# Altium PCB 175-00036, rev1, Super Sniffer.PcbDoc (part 2 of 4)
Units mil, origin at the board's own origin, x right, y up, seen from the top; angles counter-clockwise.
Board outline 6299.21 x 7874.02 mil, 5 copper layers (Top Layer (*.GTL), Mid-Layer 1 (*.G1), Internal Plane 1 (*.GP1), Mid-Layer 2  (*.G2), Bottom Layer (*.GBL)); 205 components, 359 nets, 1160 pads, 445 vias.
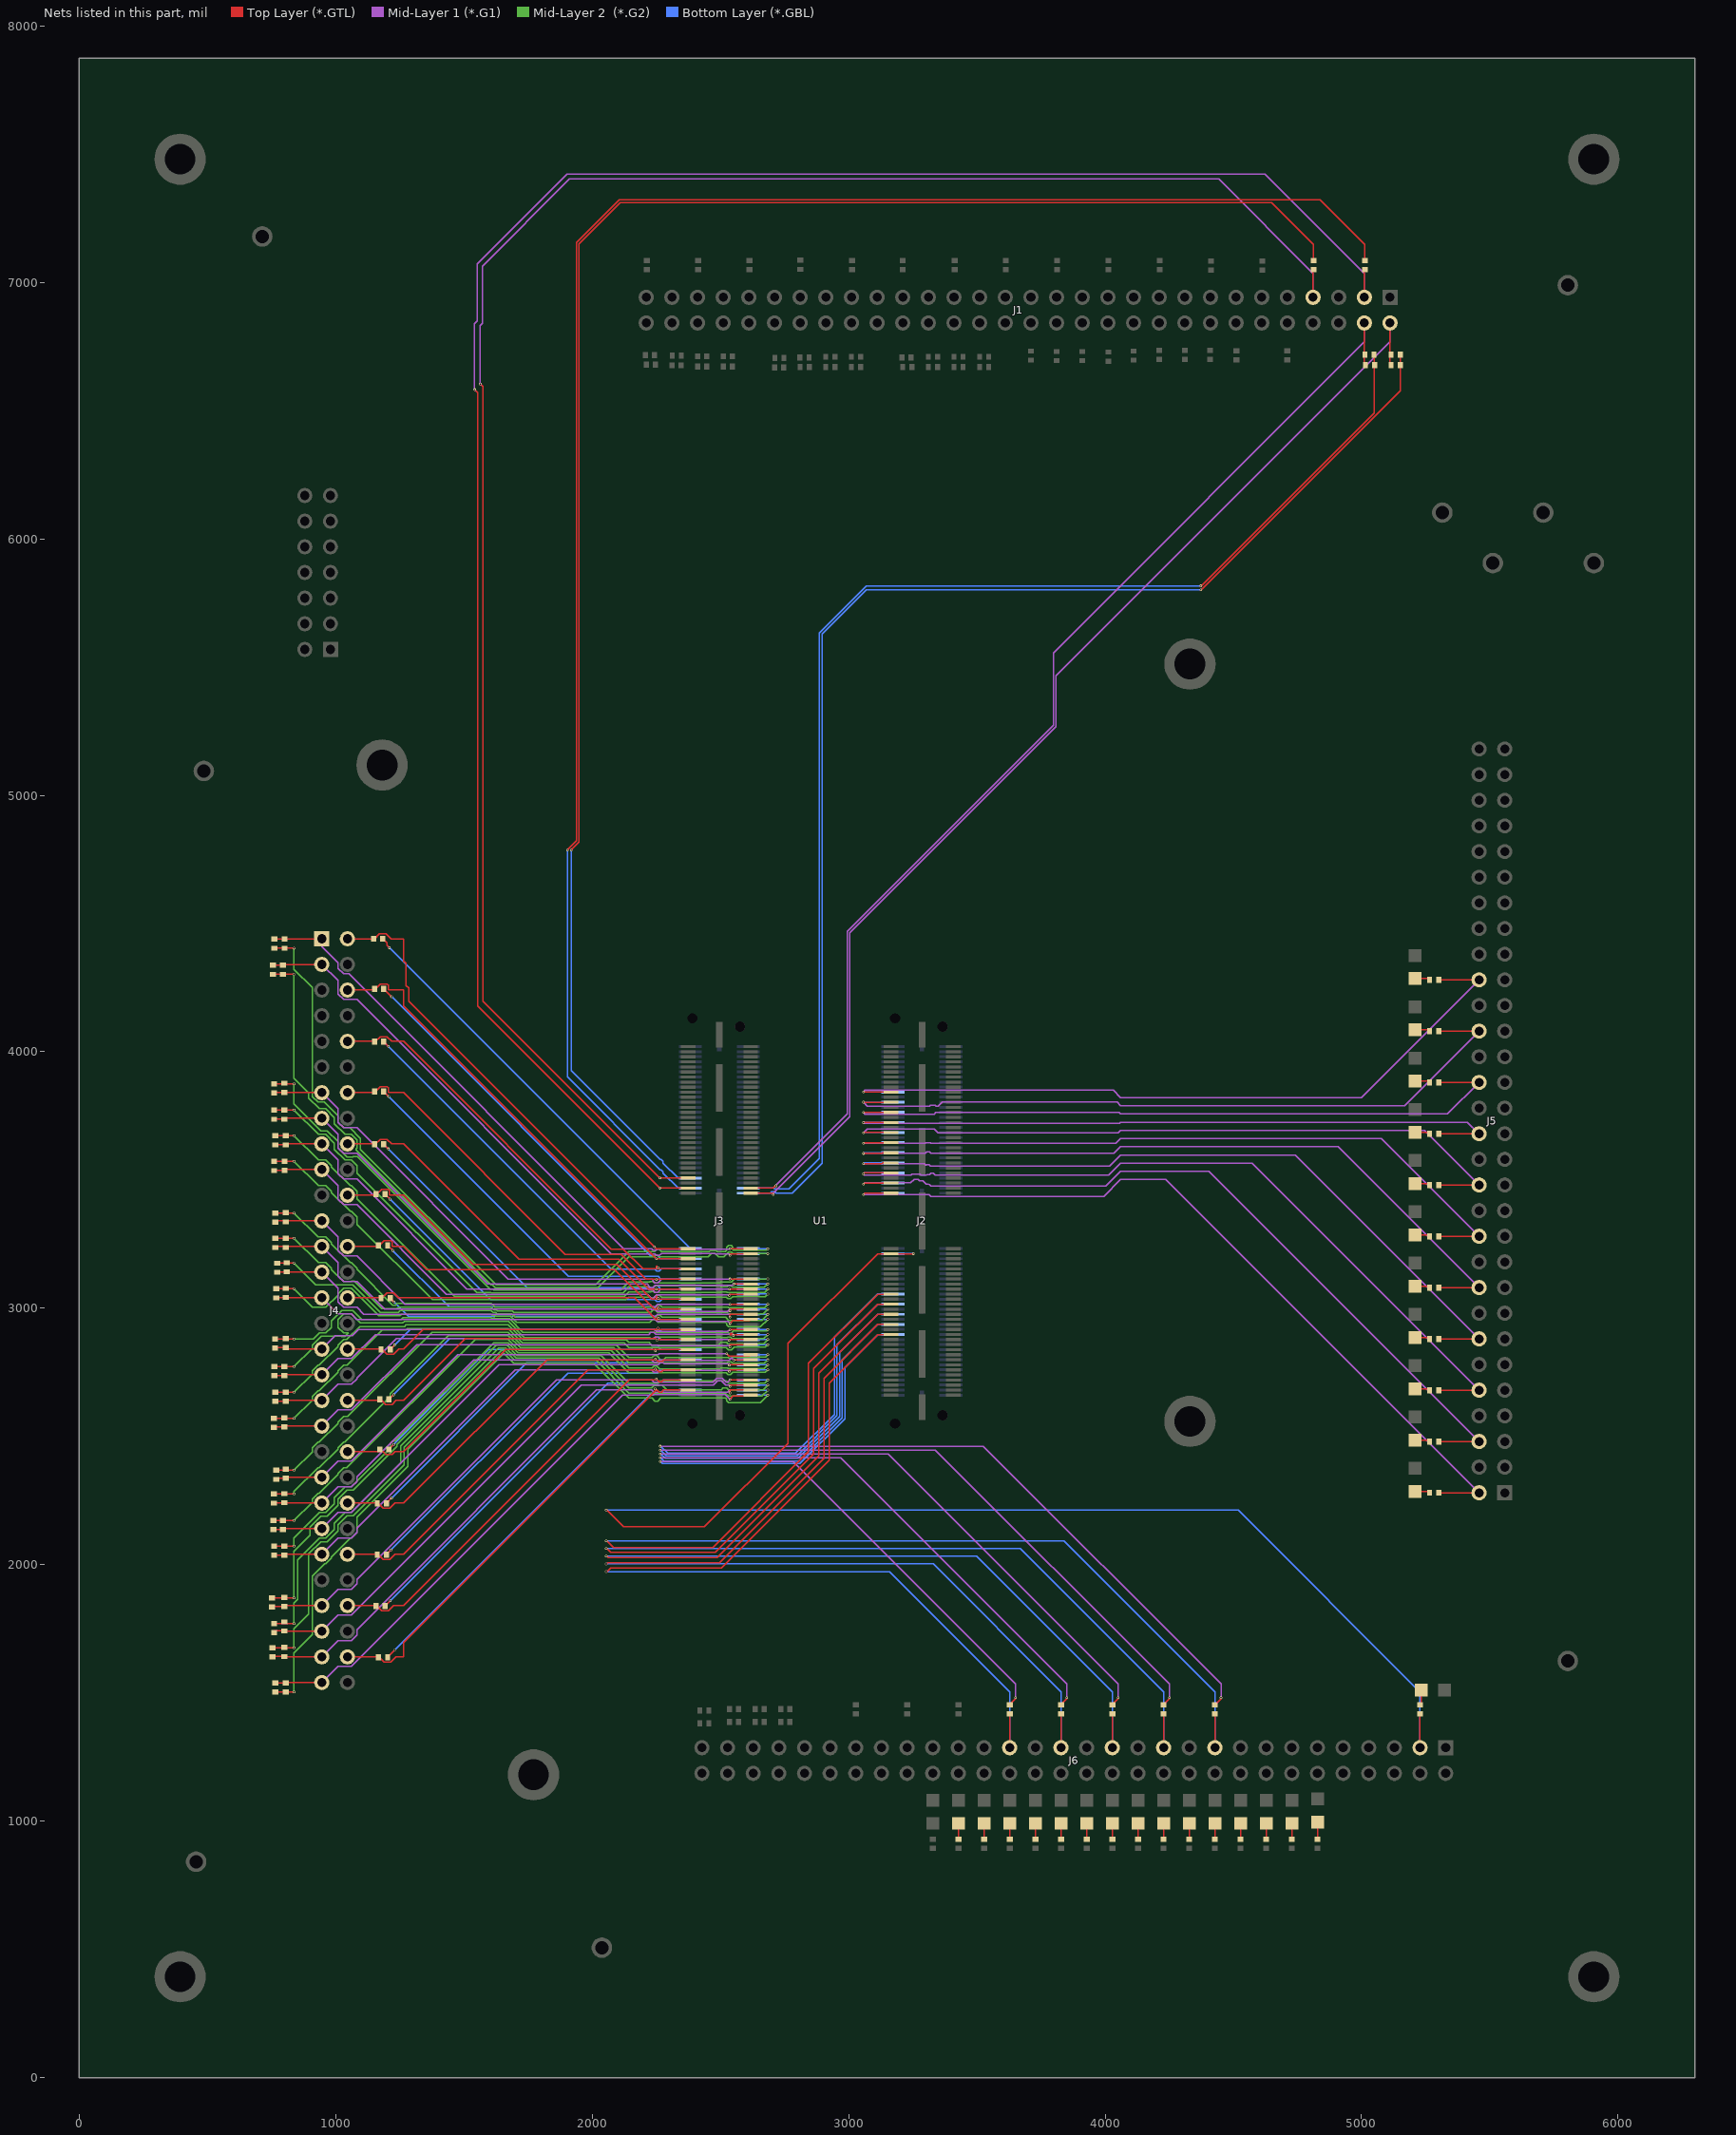
[diagram p5: the nets of this part, all layers, seen from the top]

## Via types
v1: diameter 10, hole 6, Top Layer (*.GTL) to Bottom Layer (*.GBL), 437 vias
v2: diameter 20, hole 10, Top Layer (*.GTL) to Bottom Layer (*.GBL), 8 vias

## Nets (pads, with @x,y where several pads share a name; then routed paths per layer and width w, separated by ;. In a path a pad name is that pad's centre, name@x,y a point inside that pad or via, vN(x,y) a via of type N, cw(c..) or ccw(c..) an arc to the next point about the centre after c; other vN are vias at no path point) (continued)
NetD40_1: D40.1 J1.7 U1.B54 | length 7692.1
  Top Layer (*.GTL) w5: v1(1564.28,6603.04) 1574.05,6593.27 1574.05,4198 v1(2264.05,3508) U1.B54@2374.74,3508 ; J1.7@4811.05,6941.81 D40.1@4811.05,7048.09
  Mid-Layer 1 (*.G1) w5: v1(1564.28,6603.04) 1562.38,6604.93 1562.38,6830.96 1572.05,6840.62 1572.05,7063.51 1911.35,7402.81 4443.05,7402.81 4811.05,7034.81 J1.7@4811.05,6941.81
NetD40_2: D40.2 J3.54 | length 6938.4
  Top Layer (*.GTL) w5: v1(1919.05,4785.81) 1919.05,4788.49 1949.05,4818.49 1949.05,7150.66 2110.2,7311.81 4649.05,7311.81 4813.05,7147.81 D40.2@4813.05,7085.53
  Bottom Layer (*.GBL) w5: v1(1919.05,4785.81) 1919.05,3926.22 2265.71,3579.56 2269.22,3579.56 2276.55,3572.23 2276.55,3566.51 2335.05,3508.01 J3.54@2383.06,3508.01
NetD41_1: D41.1 D43.2 J3.57 | length 5122.3
  Top Layer (*.GTL) w5: v1(4373.05,5816.81) 4375.72,5816.81 5048.48,6489.57 D41.1@5048.48,6717.81
  Bottom Layer (*.GBL) w5: J3.57@2609.04,3468.61 2708.28,3468.61 2711.58,3465.31 2767.85,3465.31 2886.05,3583.51 2886.05,5632.95 3069.91,5816.81 v1(4373.05,5816.81)
NetD41_2: D41.2 D43.1 J1.4 U1.B57 | length 4583
  Top Layer (*.GTL) w5: U1.B57@2618.05,3468.63 2706.05,3468.63 2715.23,3477.81 v1(2716.76,3477.81) ; D43.1@5011.05,6677.81 J1.4@5011.05,6841.81
  Mid-Layer 1 (*.G1) w5: v1(2716.76,3477.81) 2715.23,3477.81 2995.05,3757.63 2995.05,4468.83 3799,5272.78 3799,5555.76 5011.05,6767.81 J1.4@5011.05,6841.81
NetD42_1: D42.1 D46.2 J3.59 | length 5192.2
  Top Layer (*.GTL) w5: v1(4373.05,5801.81) 4375.72,5801.81 5150.76,6576.85 D46.2@5150.76,6677.81 D42.1@5150.76,6717.81
  Bottom Layer (*.GBL) w5: J3.59@2609.04,3448.91 2694.47,3448.91 2700.87,3455.31 2711.22,3455.31 2717.62,3448.91 2779.31,3448.91 2896.05,3565.65 2896.05,5628.81 3069.05,5801.81 v1(4373.05,5801.81)
NetD42_2: D42.2 D46.1 J1.2 U1.B59 | length 4656.3
  Top Layer (*.GTL) w5: U1.B59@2618.05,3448.94 2706.05,3448.94 v1(2706.05,3442.81) ; D46.1@5111.05,6674.81 J1.2@5111.05,6841.81
  Mid-Layer 1 (*.G1) w5: v1(2706.05,3442.81) 2706.05,3448.94 3005.05,3747.94 3005.05,4464.69 3809,5268.64 3809,5465.76 5111.05,6767.81 J1.2@5111.05,6841.81
NetD44_1: D44.1 J1.3 U1.B58 | length 7982.2
  Top Layer (*.GTL) w5: v1(1543.06,6581.83) 1554.05,6570.84 1554.05,4178.63 v1(2264.05,3468.63) U1.B58@2374.74,3468.63 ; J1.3@5011.05,6941.81 D44.1@5011.05,7048.09
  Mid-Layer 1 (*.G1) w5: v1(1543.06,6581.83) 1541.17,6583.72 1541.17,6838.03 1552.05,6848.9 1552.05,7071.79 1903.07,7422.81 4623.05,7422.81 5011.05,7034.81 J1.3@5011.05,6941.81
NetD44_2: D44.2 J3.58 | length 7206.8
  Top Layer (*.GTL) w5: v1(1904.05,4785.81) 1904.05,4788.49 1939.05,4823.49 1939.05,7154.8 2106.06,7321.81 4839.05,7321.81 5013.05,7147.81 D44.2@5013.05,7085.53
  Bottom Layer (*.GBL) w5: v1(1904.05,4785.81) 1904.05,3901.85 2265.71,3540.19 2269.22,3540.19 2276.55,3532.86 2276.55,3527.11 2335.05,3468.61 J3.58@2383.06,3468.61
NetD45_1: D45.1 D48.2 J3.61 | length 2978.7
  Top Layer (*.GTL) w5: D48.2@761.05,4404.09 D45.1@801.05,4404.09 v1(838.05,4404.09)
  Mid-Layer 2  (*.G2) w5: v1(838.05,4404.09) 838.05,4321.89 909.02,4250.92 909.02,3825.47 930.71,3803.78 955.24,3803.78 1009.02,3750 1009.02,3725.47 1030.71,3703.78 1055.24,3703.78 1097.07,3661.95 1097.07,3619.67 1625.95,3090.79 2012.73,3090.79 2143.05,3221.11 2242.28,3221.11 2251.71,3230.54 2262.07,3230.54 2271.5,3221.11 2457.46,3221.11 2460.66,3224.31 2483.44,3224.31 2486.64,3221.11 2519.53,3221.11 2524.55,3226.13 2524.55,3237.59 2531.87,3244.91 2542.22,3244.91 2549.55,3237.59 2549.55,3227.23 2549,3226.68 2679.01,3226.68 v1(2685.05,3232.71)
  Bottom Layer (*.GBL) w5: J3.61@2609.04,3232.71 v1(2685.05,3232.71)
NetD45_2: D45.2 D48.1 J4.1 U1.B61 | length 2393
  Top Layer (*.GTL) w5: D48.1@761.05,4439.53 D45.2@801.05,4439.53 802.33,4440.81 J4.1@946.05,4440.81 ; v1(2537.05,3232.41) U1.B61@2618.05,3232.41
  Mid-Layer 1 (*.G1) w5: J4.1@946.05,4440.81 946.05,4409.41 1009.02,4346.44 1009.02,4325.47 1030.71,4303.78 1051.67,4303.78 2123.05,3232.41 2232.77,3232.41 2237.87,3227.31 2248.48,3227.31 2251.71,3230.54 2535.18,3230.54 v1(2537.05,3232.41)
NetD47_1: D47.1 D50.2 J3.63 | length 2877.6
  Top Layer (*.GTL) w5: D50.2@755.05,4302.09 D47.1@795.05,4302.09 v1(838.05,4302.09)
  Mid-Layer 2  (*.G2) w5: v1(838.05,4302.09) 838.05,3896.45 895.02,3839.47 895.02,3819.67 936.86,3777.84 961.38,3777.84 995.02,3744.2 995.02,3719.67 1036.86,3677.84 1061.38,3677.84 1083.07,3656.15 1083.07,3625.47 1079.16,3621.56 1079.16,3617.78 1606.15,3090.79 1611.8,3090.79 1621.8,3080.79 2022.43,3080.79 2143.05,3201.41 2240.74,3201.41 2244.87,3205.54 2255.22,3205.54 2259.35,3201.41 2451.9,3201.41 2464.8,3214.31 2479.3,3214.31 2492.2,3201.41 2513.97,3201.41 2531.87,3219.31 2542.22,3219.31 2548.52,3213.01 v1(2685.05,3213.01)
  Bottom Layer (*.GBL) w5: J3.63@2609.04,3213.01 v1(2685.05,3213.01)
NetD47_2: D47.2 D50.1 J4.3 U1.B63 | length 2372.8
  Top Layer (*.GTL) w5: D50.1@755.05,4337.53 D47.2@795.05,4337.53 ; D47.2@802.33,4340.81 J4.3@946.05,4340.81 ; v1(2537.05,3206.81) 2537.05,3212.72 U1.B63@2618.05,3212.72
  Mid-Layer 1 (*.G1) w5: J4.3@946.05,4340.81 1009.02,4277.84 1009.02,4225.47 1030.71,4203.78 1083.07,4203.78 2074.13,3212.72 2244.53,3212.72 2251.71,3205.54 2262.07,3205.54 2270.84,3214.31 2479.3,3214.31 2480.88,3212.72 2537.05,3212.72 v1(2537.05,3206.81)
NetD49_1: D49.1 J4.2 U1.B62 | length 1988.8
  Top Layer (*.GTL) w5: J4.2@1046.05,4440.81 D49.1@1148.61,4440.81 1151.79,4440.81 1171.1,4460.12 1197,4460.12 1216.31,4440.81 1265.05,4440.81 1265.05,4350.81 1269.19,4350.81 1275.05,4344.95 1275.05,4259.1 1285.05,4249.1 1285.05,4197.41 2250.05,3232.41 ; v1(2243.05,3239.81) 2243.05,3239.41 2250.05,3232.41 ; U1.B62@2374.74,3232.41 2250.05,3232.41
NetD49_2: D49.2 J3.62 | length 1704.7
  Top Layer (*.GTL) w5: D49.2@1184.05,4440.81 1200.05,4424.81 1200.05,4415.72 v1(1209.77,4406)
  Bottom Layer (*.GBL) w5: v1(1209.77,4406) J3.62@2383.06,3232.71
NetD51_1: D51.1 J4.6 U1.B66 | length 1830.2
  Top Layer (*.GTL) w5: J4.6@1046.05,4240.81 D51.1@1151.5,4240.81 ; D51.1@1152.33,4240.81 D51.1@1151.5,4240.81 ; U1.B66@2374.74,3193.04 v1(2250.05,3193.04) 1265.05,4178.04 1265.05,4240.81 1205.91,4240.81 1205.11,4241.61 1205.11,4259.73 1200.71,4264.12 1174.81,4264.12 D51.1@1151.5,4240.81
NetD51_2: D51.2 J3.66 | length 1630.8
  Top Layer (*.GTL) w5: D51.2@1187.76,4244.81 v1@1217.81,4214.76
  Bottom Layer (*.GBL) w5: v1(1218.05,4215) 2227.27,3205.78 ; 2227.04,3205.54 2255.22,3205.54 2267.45,3193.31 J3.66@2383.06,3193.31
NetD52_1: D52.1 J4.10 U1.B70 | length 1732.4
  Top Layer (*.GTL) w5: J4.10@1046.05,4040.81 1156.5,4040.81 1174.81,4059.12 1200.71,4059.12 1219.02,4040.81 1265.05,4040.81 2075.05,3230.81 2121.49,3230.81 2198.63,3153.67 2250.05,3153.67 ; v1(2257.05,3157.81) 2250.05,3164.81 2250.05,3153.67 ; U1.B70@2374.74,3153.67 2250.05,3153.67
NetD52_2: D52.2 J3.70 | length 1569.6
  Top Layer (*.GTL) w5: D52.2@1187.76,4039.81 1206.05,4021.53 v1(1206.05,4020.81)
  Bottom Layer (*.GBL) w5: v1@1206.41,4021.17 2075.26,3152.31 2244.87,3152.31 2251.87,3145.31 2262.22,3145.31 2270.83,3153.91 J3.70@2383.06,3153.91
NetD53_1: D53.1 D55.2 J3.73 | length 2420.5
  Top Layer (*.GTL) w5: D53.1@760.05,3875.24 v1(838.05,3875.24)
  Mid-Layer 2  (*.G2) w5: v1(838.05,3875.24) 838.05,3796.45 942.65,3691.84 967.18,3691.84 1009.02,3650 1009.02,3625.47 1044.71,3589.78 1067.18,3589.78 1069.24,3591.84 1085.3,3591.84 1602.05,3075.09 1613.36,3075.09 1617.66,3070.79 2110.93,3070.79 2143.05,3102.91 2224.47,3102.91 2226.87,3105.31 2237.22,3105.31 2243.22,3099.31 2498.45,3099.31 2502.05,3102.91 2530.76,3102.91 2531.87,3101.8 2542.22,3101.8 2553.74,3113.31 2683.84,3113.31 v1(2685.05,3114.51)
  Bottom Layer (*.GBL) w5: J3.73@2609.04,3114.51 v1(2685.05,3114.51)
NetD53_2: D53.2 D55.1 J4.13 U1.B73 | length 2201.2
  Top Layer (*.GTL) w5: D53.2@760.05,3842.09 D55.1@800.05,3842.09 ; D55.1@802.33,3840.81 J4.13@946.05,3840.81 ; v1(2537.05,3114.3) U1.B73@2618.05,3114.3
  Mid-Layer 1 (*.G1) w5: J4.13@946.05,3840.81 1009.02,3777.84 1009.02,3725.47 1030.71,3703.78 1083.07,3703.78 1672.56,3114.3 2232.37,3114.3 2237.55,3109.12 2237.55,3106.63 2244.87,3099.31 2255.22,3099.31 2270.21,3114.3 v1(2537.05,3114.3)
NetD54_1: D54.1 D58.2 J3.75 | length 2351.9
  Top Layer (*.GTL) w5: D54.1@760.05,3772.53 D58.2@800.05,3772.53 v1(838.05,3772.53)
  Mid-Layer 2  (*.G2) w5: v1(838.05,3772.53) 932.74,3677.84 961.38,3677.84 995.02,3644.2 995.02,3619.67 1036.86,3577.84 1061.38,3577.84 1083.07,3556.15 1083.07,3527.5 1549.48,3061.09 1606.15,3061.09 1606.45,3060.79 2120.63,3060.79 2143.05,3083.21 2223.97,3083.21 2226.87,3080.31 2237.22,3080.31 2244.34,3087.43 2497.83,3087.43 2502.05,3083.21 2525.77,3083.21 2529.87,3087.31 2541.87,3087.31 2547.87,3081.31 2671.54,3081.31 v1(2685.05,3094.81)
  Bottom Layer (*.GBL) w5: J3.75@2609.04,3094.81 v1(2685.05,3094.81)
NetD54_2: D54.2 D58.1 J4.15 U1.B75 | length 2168.2
  Top Layer (*.GTL) w5: D54.2@760.05,3737.09 D58.1@800.05,3737.09 ; D58.1@802.33,3740.81 J4.15@946.05,3740.81 ; v1(2553.05,3094.61) U1.B75@2618.05,3094.61
  Mid-Layer 1 (*.G1) w5: J4.15@946.05,3740.81 1009.02,3677.84 1009.02,3625.47 1030.71,3603.78 1083.07,3603.78 1592.24,3094.61 2216.57,3094.61 2219.55,3091.63 2219.55,3087.63 2226.87,3080.31 2237.22,3080.31 2246.22,3089.31 2547.74,3089.31 v1(2553.05,3094.61)
NetD56_1: D56.1 J4.14 U1.B74 | length 1662.9
  Top Layer (*.GTL) w5: J4.14@1046.05,3840.81 D56.1@1151.5,3840.81 ; D56.1@1152.33,3840.81 D56.1@1151.5,3840.81 ; v1(2250.05,3111.81) v1@2250.05,3114.3 ; U1.B74@2374.74,3114.3 v1@2250.05,3114.3 ; D56.1@1151.5,3840.81 1174.81,3864.12 1200.71,3864.12 1205.11,3859.73 1205.11,3841.61 1205.91,3840.81 1265.05,3840.81 1895.05,3210.81 2113.21,3210.81 2209.72,3114.3 v1@2250.05,3114.3
NetD56_2: D56.2 J3.74 | length 1497.9
  Top Layer (*.GTL) w5: D56.2@1187.76,3844.81 1206.76,3825.81 v1(1207.05,3825.81)
  Bottom Layer (*.GBL) w5: v1@1206.91,3825.67 1908.26,3124.31 2257.71,3124.31 2267.51,3114.51 J3.74@2383.06,3114.51
NetD57_1: D57.1 D60.2 J3.77 | length 2289.6
  Top Layer (*.GTL) w5: D57.1@765.05,3672.53 D60.2@805.05,3672.53 v1(838.05,3672.53)
  Mid-Layer 2  (*.G2) w5: v1(838.05,3672.53) 932.74,3577.84 961.38,3577.84 983.07,3556.15 983.07,3551.42 1056.65,3477.84 1061.38,3477.84 1083.07,3456.15 1083.07,3427.5 1463.48,3047.09 2126.63,3047.09 2143.05,3063.51 2228.07,3063.51 2229.87,3065.31 2240.22,3065.31 2243.11,3062.43 2500.97,3062.43 2502.05,3063.51 2524.67,3063.51 2525.87,3062.31 2672.24,3062.31 v1(2685.05,3075.11)
  Bottom Layer (*.GBL) w5: J3.77@2609.04,3075.11 v1(2685.05,3075.11)
NetD57_2: D57.2 D60.1 J4.17 U1.B77 | length 2134.9
  Top Layer (*.GTL) w5: D57.2@765.05,3637.09 D60.1@805.05,3637.09 ; D60.1@802.33,3640.81 J4.17@946.05,3640.81 ; v1@2537.05,3076.81 2537.05,3074.93 U1.B77@2618.05,3074.93
  Mid-Layer 1 (*.G1) w5: J4.17@946.05,3640.81 1009.02,3577.84 1009.02,3525.47 1030.71,3503.78 1083.07,3503.78 1511.93,3074.93 2218.11,3074.93 2222.73,3070.31 2236.99,3070.31 2244.87,3062.43 2255.22,3062.43 2267.72,3074.93 2537.05,3074.93 v1@2537.05,3076.81
  other v1: 2536.05,3074.81
NetD59_1: D59.1 D62.2 J3.79 | length 2267.7
  Top Layer (*.GTL) w5: D59.1@760.05,3572.53 v1(838.05,3572.53)
  Mid-Layer 2  (*.G2) w5: v1(838.05,3572.53) 932.74,3477.84 961.38,3477.84 983.07,3456.15 983.07,3451.42 1056.65,3377.84 1061.38,3377.84 1083.07,3356.15 1083.07,3327.5 1377.48,3033.09 2132.33,3033.09 2143.05,3043.81 2226.37,3043.81 2229.87,3040.31 2240.22,3040.31 2251.22,3051.31 2263.22,3051.31 2270.72,3043.81 2523.37,3043.81 2529.87,3037.31 2540.22,3037.31 2548.32,3045.4 2675.03,3045.4 v1(2685.05,3055.41)
  Bottom Layer (*.GBL) w5: J3.79@2609.04,3055.41 v1(2685.05,3055.41)
NetD59_2: D59.2 D62.1 J4.19 U1.B79 | length 2112.4
  Top Layer (*.GTL) w5: D59.2@761.05,3537.88 D62.1@801.05,3537.88 ; D62.1@802.33,3540.81 J4.19@946.05,3540.81 ; v1(2535.05,3049.81) 2535.05,3053.24 2537.05,3055.24 U1.B79@2618.05,3055.24
  Mid-Layer 1 (*.G1) w5: J4.19@946.05,3540.81 1009.02,3477.84 1009.02,3425.47 1030.71,3403.78 1083.07,3403.78 1431.61,3055.24 2214.94,3055.24 2229.87,3040.31 2240.22,3040.31 2252.34,3052.43 2534.23,3052.43 2537.05,3055.24 2537.05,3053.81 2535.05,3051.81 v1(2535.05,3049.81)
NetD61_1: D61.1 J4.18 U1.B78 | length 1578.3
  Top Layer (*.GTL) w5: J4.18@1046.05,3640.81 1156.5,3640.81 1174.81,3659.12 1200.71,3659.12 1219.02,3640.81 1265.05,3640.81 1715.05,3190.81 2104.92,3190.81 2220.8,3074.93 v1(2250.05,3074.93) U1.B78@2374.74,3074.93
NetD61_2: D61.2 J3.78 | length 1435.2
  Top Layer (*.GTL) w5: D61.2@1187.76,3639.81 1205.76,3621.81 v1(1206.05,3621.81)
  Bottom Layer (*.GBL) w5: v1@1205.91,3621.67 1747.26,3080.31 2237.75,3080.31 2244.87,3087.43 2255.22,3087.43 2267.54,3075.11 J3.78@2383.06,3075.11
NetD63_1: D63.1 D66.2 J3.83 | length 2170.8
  Top Layer (*.GTL) w5: D63.1@765.05,3371.03 v1(838.05,3371.03)
  Mid-Layer 2  (*.G2) w5: v1(838.05,3371.03) 931.24,3277.84 961.38,3277.84 983.07,3256.15 983.07,3251.42 1056.65,3177.84 1061.38,3177.84 1083.07,3156.15 1083.07,3152.11 1222.87,3012.31 1233.22,3012.31 1240.01,3019.09 1606.15,3019.09 1610.15,3015.09 1610.29,3015.09 1614.29,3011.09 1614.43,3011.09 1618.43,3007.09 1618.57,3007.09 1621.26,3004.41 2246.97,3004.41 2254.87,3012.31 2265.22,3012.31 2273.12,3004.41 2530.83,3004.41 2531.87,3003.37 2672.41,3003.37 v1(2685.05,3016.01)
  Bottom Layer (*.GBL) w5: J3.83@2609.04,3016.01 v1(2685.05,3016.01)
NetD63_2: D63.2 D66.1 J4.23 U1.B83 | length 2030.8
  Top Layer (*.GTL) w5: D63.2@762.33,3340.81 802.33,3340.81 J4.23@946.05,3340.81 ; v1(2537.05,3015.87) 2537.61,3015.31 2617.48,3015.31 U1.B83@2618.05,3015.87
  Mid-Layer 1 (*.G1) w5: J4.23@946.05,3340.81 1009.02,3277.84 1009.02,3225.47 1030.71,3203.78 1083.07,3203.78 1270.98,3015.87 2226.31,3015.87 2228.55,3013.63 2228.55,3012.63 2235.87,3005.31 2246.22,3005.31 2256.79,3015.87 v1(2537.05,3015.87)
NetD64_1: D64.1 J4.22 U1.B82 | length 1549.9
  Top Layer (*.GTL) w5: J4.22@1046.05,3440.81 D64.1@1156.5,3440.81 ; D64.1@1157.33,3440.81 D64.1@1156.5,3440.81 ; v1(2258.05,3038.81) 2250.05,3046.81 2250.05,3035.56 ; U1.B82@2374.74,3035.56 2250.05,3035.56 ; D64.1@1156.5,3440.81 1179.81,3464.12 1205.71,3464.12 1210.11,3459.73 1210.11,3441.61 1210.91,3440.81 1265.05,3440.81 1535.05,3170.81 2096.64,3170.81 2231.89,3035.56 2250.05,3035.56
NetD64_2: D64.2 J3.82 | length 1367.7
  Top Layer (*.GTL) w5: D64.2@1192.76,3444.81 1211.05,3426.53 v1(1211.05,3425.81)
  Bottom Layer (*.GBL) w5: v1@1211.41,3426.17 1603.26,3034.31 2244.87,3034.31 2252.87,3026.31 2263.22,3026.31 2272.63,3035.71 J3.82@2383.06,3035.71
NetD65_1: D65.1 D69.2 J3.85 | length 2142.6
  Top Layer (*.GTL) w5: D65.1@765.05,3272.53 D69.2@805.05,3272.53 v1(838.05,3272.53)
  Mid-Layer 2  (*.G2) w5: v1(838.05,3272.53) 932.74,3177.84 961.38,3177.84 983.07,3156.15 983.07,3151.42 1030.71,3103.78 1061.38,3103.78 1063.44,3105.84 1072.98,3105.84 1180.51,2998.31 1239.02,2998.31 1245.81,3005.09 1606.15,3005.09 1610.15,3001.09 1610.29,3001.09 1614.29,2997.09 1614.43,2997.09 1618.43,2993.09 1628.47,2993.09 1632.47,2989.09 1690.04,2989.09 1694.42,2984.71 2228.27,2984.71 2236.87,2993.31 2247.22,2993.31 2255.82,2984.71 2525.47,2984.71 2531.87,2978.31 2667.04,2978.31 v1(2685.05,2996.31)
  Bottom Layer (*.GBL) w5: J3.85@2609.04,2996.31 v1(2685.05,2996.31)
NetD65_2: D65.2 D69.1 J4.25 U1.B85 | length 2005.8
  Top Layer (*.GTL) w5: D65.2@762.33,3240.81 802.33,3240.81 J4.25@946.05,3240.81 ; v1(2537.05,2990.81) 2537.05,2996.19 U1.B85@2618.05,2996.19
  Mid-Layer 1 (*.G1) w5: J4.25@946.05,3240.81 1009.02,3177.84 1009.02,3125.47 1030.71,3103.78 1083.07,3103.78 1190.67,2996.19 2230.85,2996.19 2231.73,2995.31 2246.87,2995.31 2254.87,2987.31 2528.17,2987.31 2537.05,2996.19 v1(2537.05,2990.81)
NetD67_1: D67.1 D71.2 J3.87 | length 2103.4
  Top Layer (*.GTL) w5: D67.1@772.05,3176.03 v1(838.05,3176.03)
  Mid-Layer 2  (*.G2) w5: v1(838.05,3176.03) 922.24,3091.84 1067.18,3091.84 1174.71,2984.31 1244.82,2984.31 1251.61,2991.09 1606.15,2991.09 1610.15,2987.09 1610.29,2987.09 1614.29,2983.09 1624.33,2983.09 1628.33,2979.09 1685.89,2979.09 1699.98,2965.01 2230.43,2965.01 2231.73,2966.31 2247.87,2966.31 2254.87,2973.31 2265.22,2973.31 2273.52,2965.01 2520.17,2965.01 2531.87,2953.31 2661.74,2953.31 v1(2685.05,2976.61)
  Bottom Layer (*.GBL) w5: J3.87@2609.04,2976.61 v1(2685.05,2976.61)
NetD67_2: D67.2 D71.1 J4.27 U1.B87 | length 1982.6
  Top Layer (*.GTL) w5: D67.2@770.05,3142.09 D71.1@810.05,3142.09 ; D71.1@802.33,3140.81 J4.27@946.05,3140.81 ; v1(2537.05,2965.81) 2537.05,2976.5 U1.B87@2618.05,2976.5
  Mid-Layer 1 (*.G1) w5: J4.27@946.05,3140.81 1009.02,3077.84 1009.02,3025.47 1030.71,3003.78 1083.07,3003.78 1110.35,2976.5 2228.68,2976.5 2236.87,2968.31 2247.22,2968.31 2255.42,2976.5 2537.05,2976.5 v1(2537.05,2965.81)
NetD68_1: D68.1 J4.26 U1.B86 | length 1475.9
  Top Layer (*.GTL) w5: J4.26@1046.05,3240.81 1166.5,3240.81 1189.81,3264.12 1215.71,3264.12 1220.11,3259.73 1220.11,3241.61 1220.91,3240.81 1265.05,3240.81 1355.05,3150.81 2088.35,3150.81 2242.98,2996.19 2250.05,2996.19 ; v1(2260.05,2999.81) 2260.05,3001.81 2258.05,3003.81 2257.67,3003.81 2250.05,2996.19 ; U1.B86@2374.74,2996.19 2250.05,2996.19
NetD68_2: D68.2 J3.86 | length 1290.8
  Top Layer (*.GTL) w5: D68.2@1202.76,3244.81 1221.76,3225.81 v1(1222.05,3225.81)
  Bottom Layer (*.GBL) w5: v1@1221.91,3225.67 1442.26,3005.31 2236.87,3005.31 2254.87,2987.31 2265.22,2987.31 2269.22,2991.31 2378.05,2991.31 J3.86@2383.06,2996.31
NetD70_1: D70.1 D72.2 J3.89 | length 2148.6
  Top Layer (*.GTL) w5: D70.1@768.05,3076.03 v1(838.05,3076.03)
  Mid-Layer 2  (*.G2) w5: v1(838.05,3076.03) 910.29,3003.78 961.38,3003.78 1009.02,3051.42 1009.02,3056.15 1030.71,3077.84 1061.38,3077.84 1168.91,2970.31 1250.62,2970.31 1257.41,2977.09 1606.15,2977.09 1611.03,2972.22 1611.91,2973.09 1620.19,2973.09 1624.19,2969.09 1681.75,2969.09 1705.54,2945.31 2224.87,2945.31 2235.87,2956.31 2246.22,2956.31 2257.22,2945.31 2519.87,2945.31 2524.55,2940.63 2524.55,2935.63 2531.87,2928.31 2656.44,2928.31 v1(2685.05,2956.91)
  Bottom Layer (*.GBL) w5: J3.89@2609.04,2956.91 v1(2685.05,2956.91)
NetD70_2: D70.2 D72.1 J4.29 U1.B89 | length 1903.8
  Top Layer (*.GTL) w5: D70.2@762.33,3040.81 802.33,3040.81 J4.29@946.05,3040.81 ; v1(2537.05,2940.81) 2549.55,2953.31 2614.54,2953.31 U1.B89@2618.05,2956.82
  Mid-Layer 1 (*.G1) w5: J4.29@946.05,3040.81 1009.02,2977.84 1061.38,2977.84 1082.4,2956.82 2246.36,2956.82 2254.87,2948.31 2529.55,2948.31 v1(2537.05,2940.81)
NetD73_1: D73.1 J4.30 U1.B90 | length 1395.8
  Top Layer (*.GTL) w5: J4.30@1046.05,3040.81 1181.5,3040.81 1199.81,3059.12 1225.71,3059.12 1244.02,3040.81 2166.06,3040.81 2229.55,2977.32 2229.55,2975.63 2248.36,2956.82 2250.05,2956.82 ; v1(2260.05,2960.81) 2260.05,2962.81 2258.05,2964.81 2250.05,2956.82 ; U1.B90@2374.74,2956.82 2250.05,2956.82
NetD73_2: D73.2 J3.90 | length 1211.8
  Top Layer (*.GTL) w5: D73.2@1212.76,3039.81 1227.76,3024.81 v1(1228.05,3024.81)
  Bottom Layer (*.GBL) w5: v1@1227.91,3024.67 1284.26,2968.31 2234.87,2968.31 2254.87,2948.31 2265.22,2948.31 2267.22,2950.31 2376.45,2950.31 J3.90@2383.06,2956.91
NetD74_1: D74.1 D76.2 J3.93 | length 2106.7
  Top Layer (*.GTL) w5: D74.1@764.05,2880.53 v1(838.05,2880.53)
  Mid-Layer 2  (*.G2) w5: v1(838.05,2880.53) 913.6,2880.53 936.86,2903.78 961.38,2903.78 983.07,2925.47 983.07,2950 1024.91,2991.84 1067.18,2991.84 1102.71,2956.31 1256.42,2956.31 1263.2,2963.09 1606.01,2963.09 1606.88,2962.22 1615.17,2962.22 1616.05,2963.09 1620.05,2959.09 1677.61,2959.09 1730.79,2905.91 2228.47,2905.91 2228.87,2906.31 2501.65,2906.31 2502.05,2905.91 2529.27,2905.91 2531.87,2903.31 2542.22,2903.31 2551.19,2912.27 2679.8,2912.27 v1(2685.05,2917.51)
  Bottom Layer (*.GBL) w5: J3.93@2609.04,2917.51 v1(2685.05,2917.51)
NetD74_2: D74.2 D76.1 J4.33 U1.B93 | length 1897.5
  Top Layer (*.GTL) w5: D74.2@765.05,2847.09 D76.1@805.05,2847.09 ; D76.1@802.33,2840.81 J4.33@946.05,2840.81 ; v1(2537.05,2915.81) 2537.05,2917.45 U1.B93@2618.05,2917.45
  Mid-Layer 1 (*.G1) w5: J4.33@946.05,2840.81 999.02,2893.78 1065.53,2893.78 1089.19,2917.45 2243.73,2917.45 2251.87,2909.31 2528.91,2909.31 2537.05,2917.45 v1(2537.05,2915.81)
NetD75_1: D75.1 D79.2 J3.95 | length 2252.2
  Top Layer (*.GTL) w5: D75.1@761.05,2772.53 D79.2@800.05,2772.53 v1(838.05,2772.53)
  Mid-Layer 2  (*.G2) w5: v1(838.05,2772.53) 909.02,2843.5 909.02,2856.15 944.71,2891.84 1022.86,2891.84 1024.91,2889.78 1035.5,2889.78 1049.5,2903.78 1030.71,2903.78 1009.02,2925.47 1009.02,2956.15 1030.71,2977.84 1061.38,2977.84 1096.91,2942.31 1262.22,2942.31 1269,2949.09 1673.47,2949.09 1736.35,2886.21 2223.97,2886.21 2228.87,2881.31 2239.22,2881.31 2246.22,2888.31 2499.95,2888.31 2502.05,2886.21 2527.5,2886.21 2528.6,2887.31 2539.87,2887.31 2545.87,2881.31 2668.54,2881.31 v1(2685.05,2897.81)
  Bottom Layer (*.GBL) w5: J3.95@2609.04,2897.81 v1(2685.05,2897.81)
NetD75_2: D75.2 D79.1 J4.35 U1.B95 | length 1969.3
  Top Layer (*.GTL) w5: D75.2@760.05,2737.09 D79.1@800.05,2737.09 ; D79.1@802.33,2740.81 J4.35@946.05,2740.81 ; v1(2551.05,2893.81) 2550.05,2894.81 2550.05,2896.39 2543.62,2902.81 2542.09,2902.81 2537.05,2897.76 U1.B95@2618.05,2897.76
  Mid-Layer 1 (*.G1) w5: J4.35@946.05,2740.81 1009.02,2803.78 1061.38,2803.78 1155.36,2897.76 2220.32,2897.76 2228.87,2906.31 2240.73,2906.31 2248.27,2898.77 2536.04,2898.77 2537.05,2897.76 2542.09,2902.81 2543.62,2902.81 2550.05,2896.39 2550.05,2894.81 v1(2551.05,2893.81)
NetD77_1: D77.1 J4.34 U1.B94 | length 1389.8
  Top Layer (*.GTL) w5: J4.34@1046.05,2840.81 1179.5,2840.81 1199.81,2820.5 1225.71,2820.5 1246.02,2840.81 1265.05,2840.81 1341.69,2917.45 2250.05,2917.45 ; v1(2257.05,2921.81) 2257.05,2924.45 2250.05,2917.45 ; U1.B94@2374.74,2917.45 2250.05,2917.45
NetD77_2: D77.2 J3.94 | length 1209.4
  Top Layer (*.GTL) w5: D77.2@1212.76,2839.81 1229.76,2856.81 v1(1230.05,2856.81)
  Bottom Layer (*.GBL) w5: v1@1229.91,2856.95 1290.47,2917.51 2243.67,2917.51 2251.87,2909.31 2262.22,2909.31 2270.43,2917.51 J3.94@2383.06,2917.51
NetD78_1: D78.1 D81.2 J3.97 | length 2160.7
  Top Layer (*.GTL) w5: D78.1@765.05,2672.53 D81.2@805.05,2672.53 v1(838.05,2672.53)
  Mid-Layer 2  (*.G2) w5: v1(838.05,2672.53) 909.02,2743.5 909.02,2756.15 930.71,2777.84 935.44,2777.84 1009.02,2851.42 1009.02,2856.15 1030.71,2877.84 1043.36,2877.84 1093.83,2928.31 1268.02,2928.31 1274.8,2935.09 1673.33,2935.09 1732.21,2876.21 2133.35,2876.21 2143.05,2866.51 2222.67,2866.51 2224.55,2864.63 2224.55,2863.63 2231.87,2856.31 2491.85,2856.31 2502.05,2866.51 2524.67,2866.51 2528.87,2862.31 2669.24,2862.31 v1(2685.05,2878.11)
  Bottom Layer (*.GBL) w5: J3.97@2609.04,2878.11 v1(2685.05,2878.11)
NetD78_2: D78.2 D81.1 J4.37 U1.B97 | length 1973.1
  Top Layer (*.GTL) w5: D78.2@765.05,2637.09 D81.1@805.05,2637.09 ; D81.1@802.33,2640.81 J4.37@946.05,2640.81 ; v1(2534.05,2874.81) 2537.05,2877.81 2537.05,2878.08 U1.B97@2618.05,2878.08
  Mid-Layer 1 (*.G1) w5: J4.37@946.05,2640.81 1009.02,2703.78 1061.38,2703.78 1083.07,2725.47 1083.07,2727.52 1236.87,2881.31 2239.22,2881.31 2246.22,2888.31 2258.22,2888.31 2265.55,2880.99 2265.55,2880.26 2267.72,2878.08 2537.05,2878.08 2537.05,2877.81 v1(2534.05,2874.81)
NetD80_1: D80.1 D83.2 J3.99 | length 2201.9
  Top Layer (*.GTL) w5: D80.1@759.05,2571.03 v1(838.05,2571.03)
  Mid-Layer 2  (*.G2) w5: v1(838.05,2571.03) 909.02,2642 909.02,2656.15 930.71,2677.84 935.44,2677.84 1009.02,2751.42 1009.02,2756.15 1030.71,2777.84 1044.86,2777.84 1181.8,2914.78 1274.29,2914.78 1280.6,2921.09 1673.18,2921.09 1728.07,2866.21 2123.65,2866.21 2143.05,2846.81 2227.23,2846.81 2227.73,2846.31 2501.55,2846.31 2502.05,2846.81 2522.37,2846.81 2531.87,2837.31 2542.22,2837.31 2553.46,2848.55 2675.18,2848.55 v1(2685.05,2858.41)
  Bottom Layer (*.GBL) w5: J3.99@2609.04,2858.41 v1(2685.05,2858.41)
NetD80_2: D80.2 D83.1 J4.39 U1.B99 | length 2007.8
  Top Layer (*.GTL) w5: D80.2@760.05,2537.09 D83.1@800.05,2537.09 ; D83.1@802.33,2540.81 J4.39@946.05,2540.81 ; v1(2537.05,2849.81) 2537.05,2858.39 U1.B99@2618.05,2858.39
  Mid-Layer 1 (*.G1) w5: J4.39@946.05,2540.81 1009.02,2603.78 1061.38,2603.78 1315.99,2858.39 2229.79,2858.39 2231.87,2856.31 2256.37,2856.31 2258.37,2854.31 2532.96,2854.31 2537.05,2858.39 v1(2537.05,2849.81)
NetD82_1: D82.1 J4.38 U1.B98 | length 1446.3
  Top Layer (*.GTL) w5: J4.38@1046.05,2640.81 1179.5,2640.81 1194.81,2625.5 1220.71,2625.5 1236.02,2640.81 1265.05,2640.81 1505.55,2881.31 2246.81,2881.31 v1@2250.05,2878.08 ; v1(2253.05,2875.81) 2252.31,2875.81 v1@2250.05,2878.08 ; U1.B98@2374.74,2878.08 v1@2250.05,2878.08
NetD82_2: D82.2 J3.98 | length 1280.9
  Top Layer (*.GTL) w5: D82.2@1207.76,2644.81 1225.76,2662.81 v1(1226.05,2662.81)
  Bottom Layer (*.GBL) w5: v1@1225.91,2662.95 1444.26,2881.31 2240.87,2881.31 2247.87,2888.31 2258.22,2888.31 2265.55,2880.99 2265.55,2880.26 2267.69,2878.11 J3.98@2383.06,2878.11
NetD84_1: D84.1 D87.2 J3.103 | length 2290.9
  Top Layer (*.GTL) w5: D84.1@768.05,2368.53 v1(838.05,2368.53)
  Mid-Layer 2  (*.G2) w5: v1(838.05,2368.53) 909.02,2439.5 909.02,2456.15 930.71,2477.84 935.44,2477.84 1009.02,2551.42 1009.02,2556.15 1030.71,2577.84 1047.36,2577.84 1376.61,2907.09 1673.04,2907.09 1723.93,2856.21 2094.25,2856.21 2143.05,2807.41 2233.97,2807.41 2241.87,2815.31 2252.22,2815.31 2259.55,2807.99 2259.55,2805.63 2266.87,2798.31 2278.22,2798.31 2287.32,2807.41 2530.98,2807.41 2531.87,2806.52 2542.22,2806.52 2546.01,2810.31 2676.34,2810.31 v1(2685.05,2819.01)
  Bottom Layer (*.GBL) w5: J3.103@2609.04,2819.01 v1(2685.05,2819.01)
NetD84_2: D84.2 D87.1 J4.43 U1.B103 | length 2061.1
  Top Layer (*.GTL) w5: D84.2@765.05,2337.09 D87.1@805.05,2337.09 ; D87.1@802.33,2340.81 J4.43@946.05,2340.81 ; v1(2524.67,2823) 2533.36,2814.31 2613.33,2814.31 U1.B103@2618.05,2819.02
  Mid-Layer 1 (*.G1) w5: J4.43@946.05,2340.81 1009.02,2403.78 1061.38,2403.78 1476.62,2819.02 2257.58,2819.02 2261.87,2823.31 v1@2524.67,2823.31
NetD85_1: D85.1 J4.42 U1.B102 | length 1514.2
  Top Layer (*.GTL) w5: J4.42@1046.05,2440.81 1184.5,2440.81 1194.81,2430.5 1220.71,2430.5 1231.02,2440.81 1265.05,2440.81 1662.94,2838.71 2250.05,2838.71 ; v1(2247.05,2833.81) 2247.05,2841.71 2250.05,2838.71 ; U1.B102@2374.74,2838.71 2250.05,2838.71
NetD85_2: D85.2 J3.102 | length 1347
  Top Layer (*.GTL) w5: D85.2@1207.76,2449.81 1208.05,2449.81 v1(1227.05,2468.81)
  Bottom Layer (*.GBL) w5: v1@1226.91,2468.95 1596.67,2838.71 2232.38,2838.71 2234.55,2840.89 2234.55,2846.99 2259.55,2846.99 2259.55,2846.89 2267.72,2838.71 J3.102@2383.06,2838.71
NetD86_1: D86.1 D90.2 J3.105 | length 2326.7
  Top Layer (*.GTL) w5: D86.1@759.05,2276.03 v1(838.05,2276.03)
  Mid-Layer 2  (*.G2) w5: v1(838.05,2276.03) 838.05,2285.18 930.71,2377.84 935.44,2377.84 1009.02,2451.42 1009.02,2456.15 1030.71,2477.84 1035.44,2477.84 1213.55,2655.95 1213.55,2667.99 1438.65,2893.09 1672.9,2893.09 1719.78,2846.21 2084.55,2846.21 2143.05,2787.71 2265.27,2787.71 2265.87,2788.31 2501.45,2788.31 2502.05,2787.71 2526.27,2787.71 2529.87,2791.31 2541.87,2791.31 2547.87,2785.31 2671.04,2785.31 v1(2685.05,2799.31)
  Bottom Layer (*.GBL) w5: J3.105@2609.04,2799.31 v1(2685.05,2799.31)
NetD86_2: D86.2 D90.1 J4.45 U1.B105 | length 2115.4
  Top Layer (*.GTL) w5: D86.2@760.05,2242.09 D90.1@800.05,2242.09 ; D90.1@802.33,2240.81 J4.45@946.05,2240.81 ; v1(2553.05,2797.81) 2551.52,2799.34 U1.B105@2618.05,2799.34
  Mid-Layer 1 (*.G1) w5: J4.45@946.05,2240.81 1009.02,2303.78 1061.38,2303.78 1083.07,2325.47 1083.07,2342.52 1539.9,2799.34 2232.37,2799.34 2241.4,2790.31 2253.73,2790.31 2261.73,2798.31 2280.37,2798.31 2281.84,2796.84 2534.55,2796.84 2543.52,2805.81 2545.05,2805.81 v1(2553.05,2797.81)
NetD88_1: D88.1 D92.2 J3.107 | length 2369
  Top Layer (*.GTL) w5: D88.1@757.05,2172.53 D92.2@795.05,2172.53 v1(838.05,2172.53)
  Mid-Layer 2  (*.G2) w5: v1(838.05,2172.53) 909.02,2243.5 909.02,2256.15 930.71,2277.84 935.44,2277.84 1009.02,2351.42 1009.02,2356.15 1030.71,2377.84 1043.36,2377.84 1544.61,2879.09 1672.76,2879.09 1715.64,2836.21 2074.85,2836.21 2143.05,2768.01 2234.57,2768.01 2241.87,2775.31 2252.22,2775.31 2264.22,2763.31 2497.35,2763.31 2502.05,2768.01 2528.17,2768.01 2529.87,2766.31 2671.74,2766.31 v1(2685.05,2779.61)
  Bottom Layer (*.GBL) w5: J3.107@2609.04,2779.61 v1(2685.05,2779.61)
NetD88_2: D88.2 D92.1 J4.47 U1.B107 | length 2135.5
  Top Layer (*.GTL) w5: D88.2@755.05,2137.09 D92.1@795.05,2137.09 ; D92.1@802.33,2140.81 J4.47@946.05,2140.81 ; v1(2535.05,2778.81) 2537.05,2780.81 2537.05,2779.65 U1.B107@2618.05,2779.65
  Mid-Layer 1 (*.G1) w5: J4.47@946.05,2140.81 1009.02,2203.78 1061.38,2203.78 1637.25,2779.65 2257.21,2779.65 2265.87,2788.31 2276.22,2788.31 2281.22,2783.31 2533.39,2783.31 2537.05,2779.65 2537.05,2780.81 v1(2535.05,2778.81)
NetD89_1: D89.1 J4.46 U1.B106 | length 1589.2
  Top Layer (*.GTL) w5: J4.46@1046.05,2240.81 D89.1@1164.5,2240.81 ; D89.1@1166.33,2240.81 D89.1@1164.5,2240.81 ; v1(2247.05,2802.81) 2247.05,2802.34 v1@2250.05,2799.34 ; U1.B106@2374.74,2799.34 2279.25,2799.34 2272.22,2792.31 2257.07,2792.31 v1@2250.05,2799.34 ; D89.1@1164.5,2240.81 1184.81,2220.5 1210.71,2220.5 1231.02,2240.81 1265.05,2240.81 1823.57,2799.34 v1@2250.05,2799.34
NetD89_2: D89.2 J3.106 | length 1417.1
  Top Layer (*.GTL) w5: D89.2@1197.76,2239.81 1217.76,2259.81 v1(1218.05,2259.81)
  Bottom Layer (*.GBL) w5: v1@1217.91,2259.95 1744.79,2786.84 2255.22,2786.84 2260.7,2792.31 2272.22,2792.31 2279.23,2799.31 J3.106@2383.06,2799.31
NetD91_1: D91.1 D93.2 J3.109 | length 2432
  Top Layer (*.GTL) w5: D91.1@760.05,2072.53 D93.2@800.05,2072.53 v1(838.05,2072.53)
  Mid-Layer 2  (*.G2) w5: v1(838.05,2072.53) 838.05,2104.97 936.86,2203.78 961.38,2203.78 995.02,2237.42 995.02,2261.95 1036.86,2303.78 1061.38,2303.78 1214.55,2456.95 1214.55,2473.99 1221.87,2481.31 1232.22,2481.31 ; 1232.24,2481.29 1616.45,2865.5 1672.21,2865.5 1711.5,2826.21 2065.15,2826.21 2143.05,2748.31 2522.87,2748.31 2529.87,2741.31 2540.22,2741.31 2549.04,2750.13 2675.26,2750.13 v1(2685.05,2759.91)
  Bottom Layer (*.GBL) w5: J3.109@2609.04,2759.91 v1(2685.05,2759.91)
NetD91_2: D91.2 D93.1 J4.49 U1.B109 | length 2185.6
  Top Layer (*.GTL) w5: D91.2@760.05,2037.09 D93.1@800.05,2037.09 ; D93.1@802.33,2040.81 J4.49@946.05,2040.81 ; v1(2535.05,2753.81) 2535.05,2757.97 2537.05,2759.97 U1.B109@2618.05,2759.97
  Mid-Layer 1 (*.G1) w5: J4.49@946.05,2040.81 1009.02,2103.78 1061.38,2103.78 1083.07,2125.47 1083.07,2142.52 1700.53,2759.97 2232.37,2759.97 2234.55,2757.79 2234.55,2757.63 2241.87,2750.31 2253.73,2750.31 2260.89,2757.47 2534.55,2757.47 2537.05,2759.97 2537.05,2757.81 2535.05,2755.81 v1(2535.05,2753.81)
NetD94_1: D94.1 J4.50 U1.B110 | length 1655.8
  Top Layer (*.GTL) w5: J4.50@1046.05,2040.81 D94.1@1164.5,2040.81 ; D94.1@1166.33,2040.81 D94.1@1164.5,2040.81 ; v1(2247.05,2762.81) 2247.2,2762.81 v1@2250.05,2759.97 ; U1.B110@2374.74,2759.97 2278.88,2759.97 2271.22,2752.31 2260.87,2752.31 2253.21,2759.97 v1@2250.05,2759.97 ; D94.1@1164.5,2040.81 1184.81,2020.5 1210.71,2020.5 1231.02,2040.81 1265.05,2040.81 1984.2,2759.97 v1@2250.05,2759.97
NetD94_2: D94.2 J3.110 | length 1483.7
  Top Layer (*.GTL) w5: D94.2@1197.76,2039.81 1215.76,2057.81 v1(1216.05,2057.81)
  Bottom Layer (*.GBL) w5: v1@1215.91,2057.95 1905.42,2747.47 2255.22,2747.47 2260.07,2752.31 2271.22,2752.31 2278.83,2759.91 J3.110@2383.06,2759.91
NetD95_1: D95.1 D97.2 J3.113 | length 2634.5
  Top Layer (*.GTL) w5: D95.1@752.05,1871.03 v1(838.05,1871.03)
  Mid-Layer 2  (*.G2) w5: v1(838.05,1871.03) 838.05,2052.73 900.01,2114.69 900.01,2147.14 942.65,2189.78 967.18,2189.78 1009.02,2231.62 1009.02,2256.15 1044.71,2291.84 1067.18,2291.84 1068.21,2290.81 1239.55,2462.15 1239.55,2468.8 1626.25,2855.5 1668.07,2855.5 1707.36,2816.21 2035.75,2816.21 2143.05,2708.91 2257.33,2708.91 2265.73,2717.31 2522.66,2717.31 2531.87,2708.1 2672.63,2708.1 v1(2685.05,2720.51)
  Bottom Layer (*.GBL) w5: J3.113@2609.04,2720.51 v1(2685.05,2720.51)
NetD95_2: D95.2 D97.1 J4.53 U1.B113 | length 2249.6
  Top Layer (*.GTL) w5: D95.2@760.05,1837.09 D97.1@800.05,1837.09 ; D97.1@802.33,1840.81 J4.53@946.05,1840.81 ; v1(2537.05,2720.6) 2537.33,2720.31 2617.76,2720.31 U1.B113@2618.05,2720.6
  Mid-Layer 1 (*.G1) w5: J4.53@946.05,1840.81 1009.02,1903.78 1061.38,1903.78 1083.07,1925.47 1083.07,1942.52 1861.16,2720.6 2232.37,2720.6 2240.66,2712.31 2470,2712.31 2485,2727.31 2507.78,2727.31 2522.78,2712.31 2528.76,2712.31 v1(2537.05,2720.6)
NetD96_1: D96.1 D100.2 J3.115 | length 2726.9
  Top Layer (*.GTL) w5: D96.1@760.05,1771.03 v1(838.05,1771.03)
  Mid-Layer 2  (*.G2) w5: v1(838.05,1771.03) 838.05,1851.23 852.05,1865.23 852.05,2018.97 936.86,2103.78 961.38,2103.78 995.02,2137.42 995.02,2161.95 1036.86,2203.78 1061.38,2203.78 1253.55,2395.95 1253.55,2463 1636.05,2845.5 1663.93,2845.5 1703.21,2806.21 2026.05,2806.21 2143.05,2689.21 2231.77,2689.21 2240.87,2698.31 2260.87,2698.31 2262.87,2700.31 2273.22,2700.31 2291.22,2682.31 2503.64,2682.31 2510.54,2689.21 2524.97,2689.21 2531.87,2682.31 2666.54,2682.31 v1(2685.05,2700.81)
  Bottom Layer (*.GBL) w5: J3.115@2609.04,2700.81 v1(2685.05,2700.81)
NetD96_2: D96.2 D100.1 J4.55 U1.B115 | length 2279.2
  Top Layer (*.GTL) w5: D96.2@760.05,1742.09 D100.1@800.05,1742.09 ; D100.1@802.33,1740.81 J4.55@946.05,1740.81 ; v1(2537.05,2694.81) 2537.05,2700.91 U1.B115@2618.05,2700.91
  Mid-Layer 1 (*.G1) w5: J4.55@946.05,1740.81 1009.02,1803.78 1061.38,1803.78 1958.51,2700.91 2472.75,2700.91 2489.14,2717.31 2503.64,2717.31 2520.04,2700.91 2537.05,2700.91 v1(2537.05,2694.81)
NetD98_1: D98.1 J4.54 U1.B114 | length 1727
  Top Layer (*.GTL) w5: J4.54@1046.05,1840.81 D98.1@1159.5,1840.81 ; D98.1@1166.33,1840.81 D98.1@1159.5,1840.81 ; v1(2250.05,2724.81) v1@2250.05,2720.6 ; U1.B114@2374.74,2720.6 2278.51,2720.6 2271.22,2713.31 2260.87,2713.31 2253.58,2720.6 v1@2250.05,2720.6 ; D98.1@1159.5,1840.81 1179.81,1820.5 1205.71,1820.5 1226.02,1840.81 1265.05,1840.81 2144.83,2720.6 v1@2250.05,2720.6
NetD98_2: D98.2 J3.114 | length 1555.2
  Top Layer (*.GTL) w5: D98.2@1192.76,1839.81 1193.05,1839.81 v1(1213.05,1859.81)
  Bottom Layer (*.GBL) w5: v1@1212.91,1859.95 2061.05,2708.1 2255.22,2708.1 2260.44,2713.31 2271.22,2713.31 2278.43,2720.51 J3.114@2383.06,2720.51
NetD99_1: D99.1 D102.2 J3.117 | length 2806.5
  Top Layer (*.GTL) w5: D99.1@754.05,1676.03 v1(838.05,1676.03)
  Mid-Layer 2  (*.G2) w5: v1(838.05,1676.03) 838.05,1751.23 895.02,1808.2 895.02,2042.15 942.65,2089.78 967.18,2089.78 1009.02,2131.62 1009.02,2156.15 1044.71,2191.84 1067.18,2191.84 1068.21,2190.81 1267.55,2390.15 1267.55,2457.2 1645.85,2835.5 1659.79,2835.5 1699.07,2796.21 2016.35,2796.21 2143.05,2669.51 2519.67,2669.51 2531.87,2657.31 2661.24,2657.31 v1(2685.05,2681.11)
  Bottom Layer (*.GBL) w5: J3.117@2609.04,2681.11 v1(2685.05,2681.11)
NetD99_2: D99.2 D102.1 J4.57 U1.B117 | length 2329
  Top Layer (*.GTL) w5: D99.2@760.05,1642.09 D102.1@800.05,1642.09 ; D102.1@802.33,1640.81 J4.57@946.05,1640.81 ; v1(2537.05,2669.81) 2537.05,2681.23 U1.B117@2618.05,2681.23
  Mid-Layer 1 (*.G1) w5: J4.57@946.05,1640.81 1009.02,1703.78 1061.38,1703.78 1083.07,1725.47 1083.07,1747.52 2016.79,2681.23 2232.37,2681.23 2240.29,2673.31 2529.13,2673.31 2537.05,2681.23 v1(2537.05,2669.81)
NetD101_1: D101.1 D104.2 J3.119 | length 2949.1
  Top Layer (*.GTL) w5: D101.1@765.05,1504.09 D104.2@805.05,1504.09 v1(838.05,1504.09)
  Mid-Layer 2  (*.G2) w5: v1(838.05,1504.09) 838.05,1656.23 909.02,1727.2 909.02,1956.15 956.65,2003.78 961.38,2003.78 983.07,2025.47 983.07,2030.2 1056.65,2103.78 1061.38,2103.78 1083.07,2125.47 1083.07,2185.88 1281.55,2384.35 1281.55,2451.4 1655.65,2825.5 1694.93,2786.21 2006.65,2786.21 2143.05,2649.81 2233.37,2649.81 2244.87,2638.31 2255.22,2638.31 2266.72,2649.81 2520.37,2649.81 2524.55,2645.63 2524.55,2639.63 2531.87,2632.31 2655.94,2632.31 v1(2685.05,2661.41)
  Bottom Layer (*.GBL) w5: J3.119@2609.04,2661.41 v1(2685.05,2661.41)
NetD101_2: D101.2 D104.1 J4.59 U1.B119 | length 2335.3
  Top Layer (*.GTL) w5: D101.2@765.05,1539.53 D104.1@805.05,1539.53 ; D104.1@802.33,1540.81 J4.59@946.05,1540.81 ; v1(2537.05,2644.81) 2549.55,2657.31 2613.82,2657.31 U1.B119@2618.05,2661.54
  Mid-Layer 1 (*.G1) w5: J4.59@946.05,1540.81 1009.02,1603.78 1061.38,1603.78 2119.14,2661.54 2239.1,2661.54 2240.87,2663.31 2518.55,2663.31 v1(2537.05,2644.81)
NetD103_1: D103.1 J4.58 U1.B118 | length 1821.7
  Top Layer (*.GTL) w5: J4.58@1046.05,1640.81 1169.5,1640.81 1189.81,1620.5 1215.71,1620.5 1236.02,1640.81 1265.05,1640.81 1265.05,1696.23 2250.05,2681.23 ; v1(2246.05,2685.81) 2250.05,2681.81 2250.05,2681.23 ; U1.B118@2374.74,2681.23 2279.14,2681.23 2271.22,2673.31 2260.87,2673.31 2252.95,2681.23 2250.05,2681.23
NetD103_2: D103.2 J3.118 | length 1612.1
  Top Layer (*.GTL) w5: D103.2@1202.76,1639.81 v1(1230.95,1668)
  Bottom Layer (*.GBL) w5: v1(1230.95,1668) 2231.68,2668.73 2255.22,2668.73 2260.34,2673.84 2260.87,2673.31 2271.22,2673.31 2279.03,2681.11 J3.118@2383.06,2681.11
NetD105_1: D105.1 J2.20 J5.42 U1.A20 | length 2984.6
  Top Layer (*.GTL) w5: v1(3058.05,3843.81) 3059.21,3842.65 U1.A20@3164.9,3842.65 ; D105.1@5300.76,4280.81 J5.42@5458.05,4280.81
  Mid-Layer 1 (*.G1) w5: v1(3058.05,3843.81) 3064.55,3850.31 4032.55,3850.31 4061.05,3821.81 4999.05,3821.81 J5.42@5458.05,4280.81
  Bottom Layer (*.GBL) w5: v1(3058.05,3843.81) 3058.94,3842.91 J2.20@3173.06,3842.91
NetD105_2: D105.2 R1.2 | length 52.3
  Top Layer (*.GTL) w5: R1.2@5208.05,4285.81 D105.2@5260.33,4285.81
NetD106_1: D106.1 J2.24 J5.38 U1.A24 | length 2922
  Top Layer (*.GTL) w5: v1(3058.05,3803.81) 3058.58,3803.28 U1.A24@3164.9,3803.28 ; D106.1@5300.76,4080.81 J5.38@5458.05,4080.81
  Mid-Layer 1 (*.G1) w5: v1(3058.05,3803.81) 3073.55,3788.31 3314.73,3788.31 3318.73,3792.31 3337.37,3792.31 3341.37,3788.31 3349.22,3788.31 3364.72,3803.81 4047.05,3803.81 4061.05,3789.81 5167.05,3789.81 J5.38@5458.05,4080.81
  Bottom Layer (*.GBL) w5: v1(3058.05,3803.81) 3058.34,3803.51 J2.24@3173.06,3803.51
NetD106_2: D106.2 R2.2 | length 52.3
  Top Layer (*.GTL) w5: R2.2@5208.05,4085.81 D106.2@5260.33,4085.81
NetD107_1: D107.1 J2.28 J5.34 U1.A28 | length 2838.1
  Top Layer (*.GTL) w5: v1(3058.05,3763.81) 3058.14,3763.91 U1.A28@3164.9,3763.91 ; D107.1@5300.76,3880.81 J5.34@5458.05,3880.81
  Mid-Layer 1 (*.G1) w5: v1(3058.05,3763.81) 3064.55,3757.31 3334.05,3757.31 3340.55,3763.81 4055.05,3763.81 4061.05,3757.81 5335.05,3757.81 J5.34@5458.05,3880.81
  Bottom Layer (*.GBL) w5: v1(3058.05,3763.81) 3124.74,3763.81 3125.05,3764.11 J2.28@3173.06,3764.11
NetD107_2: D107.2 R3.2 | length 52.3
  Top Layer (*.GTL) w5: R3.2@5208.05,3885.81 D107.2@5260.33,3885.81
NetD108_1: D108.1 J2.32 J5.30 U1.A32 | length 2800.9
  Top Layer (*.GTL) w5: v1(3058.05,3723.81) 3058.77,3724.54 U1.A32@3164.9,3724.54 ; D108.1@5300.76,3680.81 J5.30@5458.05,3680.81
  Mid-Layer 1 (*.G1) w5: v1(3058.05,3723.81) 3059.94,3721.91 4057.15,3721.91 4061.05,3725.81 5413.05,3725.81 J5.30@5458.05,3680.81
  Bottom Layer (*.GBL) w5: v1(3058.05,3723.81) 3058.95,3724.71 J2.32@3173.06,3724.71
NetD108_2: D108.2 R4.2 | length 52.3
  Top Layer (*.GTL) w5: R4.2@5208.05,3685.81 D108.2@5260.33,3685.81
NetD109_1: D109.1 J2.36 J5.26 U1.A36 | length 2885.5
  Top Layer (*.GTL) w5: v1(3058.05,3683.81) 3059.4,3685.17 U1.A36@3164.9,3685.17 ; D109.1@5300.76,3480.81 J5.26@5458.05,3480.81
  Mid-Layer 1 (*.G1) w5: v1(3058.05,3683.81) 3073.55,3699.31 3334.22,3699.31 3349.72,3683.81 4051.05,3683.81 4061.05,3693.81 5245.05,3693.81 J5.26@5458.05,3480.81
  Bottom Layer (*.GBL) w5: v1(3058.05,3683.81) 3059.55,3685.31 J2.36@3173.06,3685.31
NetD109_2: D109.2 R5.2 | length 52.3
  Top Layer (*.GTL) w5: R5.2@5208.05,3485.81 D109.2@5260.33,3485.81
NetD110_1: D110.1 J2.40 J5.22 U1.A40 | length 2948.7
  Top Layer (*.GTL) w5: v1(3058.05,3643.81) 3060.03,3645.8 U1.A40@3164.9,3645.8 ; D110.1@5300.76,3280.81 J5.22@5458.05,3280.81
  Mid-Layer 1 (*.G1) w5: v1(3058.05,3643.81) 3058.88,3642.98 3298.4,3642.98 3300.73,3645.31 3319.37,3645.31 3320.37,3644.31 3339.22,3644.31 3340.56,3642.98 4042.22,3642.98 4061.05,3661.81 5077.05,3661.81 J5.22@5458.05,3280.81
  Bottom Layer (*.GBL) w5: v1(3058.05,3643.81) 3060.15,3645.91 J2.40@3173.06,3645.91
NetD110_2: D110.2 R6.2 | length 52.3
  Top Layer (*.GTL) w5: R6.2@5208.05,3285.81 D110.2@5260.33,3285.81
NetD111_1: D111.1 J2.44 J5.18 U1.A44 | length 3025.2
  Top Layer (*.GTL) w5: v1(3058.05,3603.81) 3130.43,3603.81 3133.05,3606.43 U1.A44@3164.9,3606.43 ; D111.1@5300.76,3080.81 J5.18@5458.05,3080.81
  Mid-Layer 1 (*.G1) w5: v1(3058.05,3603.81) 3058.25,3603.61 3298.17,3603.61 3304.87,3610.31 3315.22,3610.31 3321.93,3603.61 4034.85,3603.61 4061.05,3629.81 4909.05,3629.81 J5.18@5458.05,3080.81
  Bottom Layer (*.GBL) w5: v1(3058.05,3603.81) 3060.75,3606.51 J2.44@3173.06,3606.51
NetD111_2: D111.2 R7.2 | length 52.3
  Top Layer (*.GTL) w5: R7.2@5208.05,3085.81 D111.2@5260.33,3085.81
NetD112_1: D112.1 J2.48 J5.14 U1.A48 | length 3101.5
  Top Layer (*.GTL) w5: v1(3058.05,3563.81) 3129.8,3563.81 3133.05,3567.06 U1.A48@3164.9,3567.06 ; D112.1@5300.76,2880.81 J5.14@5458.05,2880.81
  Mid-Layer 1 (*.G1) w5: v1(3058.05,3563.81) 3295.37,3563.81 3300.27,3558.91 3303.11,3558.91 3303.97,3559.77 3314.33,3559.77 3319.78,3554.31 4017.55,3554.31 4061.05,3597.81 4741.05,3597.81 J5.14@5458.05,2880.81
  Bottom Layer (*.GBL) w5: v1(3058.05,3563.81) 3061.35,3567.11 J2.48@3173.06,3567.11
NetD112_2: D112.2 R8.2 | length 52.3
  Top Layer (*.GTL) w5: R8.2@5208.05,2885.81 D112.2@5260.33,2885.81
NetD113_1: D113.1 J2.52 J5.10 U1.A52 | length 3179.2
  Top Layer (*.GTL) w5: v1(3058.05,3523.81) 3061.92,3527.69 U1.A52@3164.9,3527.69 ; D113.1@5300.76,2680.81 J5.10@5458.05,2680.81
  Mid-Layer 1 (*.G1) w5: v1(3058.05,3523.81) 3062.55,3519.31 3243.51,3519.31 3247.51,3523.31 3278.58,3523.31 3282.58,3519.31 3303.87,3519.31 3304.87,3520.31 3314.87,3520.31 3320.87,3526.31 3331.22,3526.31 3338.22,3519.31 4014.55,3519.31 4061.05,3565.81 4573.05,3565.81 J5.10@5458.05,2680.81
  Bottom Layer (*.GBL) w5: v1(3058.05,3523.81) 3061.95,3527.71 J2.52@3173.06,3527.71
NetD113_2: D113.2 R9.2 | length 52.3
  Top Layer (*.GTL) w5: R9.2@5208.05,2685.81 D113.2@5260.33,2685.81
NetD114_1: D114.1 J2.56 J5.6 U1.A56 | length 3262.5
  Top Layer (*.GTL) w5: v1(3058.05,3483.81) 3062.55,3488.32 U1.A56@3164.9,3488.32 ; D114.1@5300.76,2480.81 J5.6@5458.05,2480.81
  Mid-Layer 1 (*.G1) w5: v1(3058.05,3483.81) 3063.05,3488.81 3241.3,3488.81 3255.8,3503.31 3270.3,3503.31 3276.3,3497.31 3288.73,3497.31 3301.73,3484.31 3312.37,3484.31 3315.2,3481.49 3320.87,3475.82 4003.05,3475.82 4061.05,3533.81 4405.05,3533.81 J5.6@5458.05,2480.81
  Bottom Layer (*.GBL) w5: v1(3058.05,3483.81) 3062.55,3488.31 J2.56@3173.06,3488.31
NetD114_2: D114.2 R10.2 | length 52.3
  Top Layer (*.GTL) w5: R10.2@5208.05,2485.81 D114.2@5260.33,2485.81
NetD115_1: D115.1 J2.60 J5.2 U1.A60 | length 3319.3
  Top Layer (*.GTL) w5: v1(3058.05,3443.81) 3063.18,3448.94 U1.A60@3164.9,3448.94 ; D115.1@5300.76,2280.81 J5.2@5458.05,2280.81
  Mid-Layer 1 (*.G1) w5: v1(3058.05,3443.81) 3313.5,3443.81 3320.87,3436.44 3995.68,3436.44 4061.05,3501.81 4237.05,3501.81 J5.2@5458.05,2280.81
  Bottom Layer (*.GBL) w5: v1(3058.05,3443.81) 3063.15,3448.91 J2.60@3173.06,3448.91
NetD115_2: D115.2 R11.2 | length 52.3
  Top Layer (*.GTL) w5: R11.2@5208.05,2285.81 D115.2@5260.33,2285.81
NetD116_1: D116.1 J2.64 J6.3 U1.A64 | length 5791
  Top Layer (*.GTL) w5: v1(2055.05,2213.35) 2057.72,2213.35 2123.26,2147.81 2438.19,2147.81 2764.05,2473.67 2764.05,2862.72 3114.05,3212.72 U1.A64@3164.9,3212.72 3252.76,3212.72 v1(3253.05,3213.01) ; J6.3@5228.05,1286.81 D116.1@5228.05,1419.09
  Bottom Layer (*.GBL) w5: v1(2055.05,2213.35) 4519.51,2213.35 5228.05,1504.81 J6.3@5228.05,1286.81 ; J2.64@3173.06,3213.01 v1(3253.05,3213.01)
NetD116_2: D116.2 R12.2 | length 59.4
  Top Layer (*.GTL) w5: D116.2@5228.05,1454.53 5233.05,1459.53 R12.2@5233.05,1511.81
NetD117_2: D117.2 R13.2 | length 62.3
  Top Layer (*.GTL) w5: D117.2@4828.05,929.53 R13.2@4828.05,991.81
NetD118_2: D118.2 R14.2 | length 62.3
  Top Layer (*.GTL) w5: D118.2@4728.05,929.53 R14.2@4728.05,991.81
NetD119_2: D119.2 R15.2 | length 62.3
  Top Layer (*.GTL) w5: D119.2@4628.05,929.53 R15.2@4628.05,991.81
NetD120_2: D120.2 R16.2 | length 62.3
  Top Layer (*.GTL) w5: D120.2@4528.05,929.53 R16.2@4528.05,991.81
NetD121_2: D121.2 R17.2 | length 62.3
  Top Layer (*.GTL) w5: D121.2@4428.05,929.53 R17.2@4428.05,991.81
NetD122_1: D122.1 J6.19 U1.A80 | length 4698.4
  Top Layer (*.GTL) w5: v1(2055.05,2093.35) 2057.72,2093.35 2083.26,2067.81 2471.33,2067.81 2844.05,2440.53 2844.05,2785.24 3114.05,3055.24 U1.A80@3164.9,3055.24 ; J6.19@4428.05,1286.81 D122.1@4428.05,1419.09
  Bottom Layer (*.GBL) w5: v1(2055.05,2093.35) 3839.51,2093.35 4428.05,1504.81 J6.19@4428.05,1286.81
NetD122_2: D122.2 J2.80 | length 4014.5
  Top Layer (*.GTL) w5: D122.2@4428.05,1454.53 4452.05,1478.53 v1(4452.05,1481.81)
  Mid-Layer 1 (*.G1) w5: v1(2265.05,2462.31) 3524.55,2462.31 4452.05,1534.81 v1(4452.05,1481.81)
  Bottom Layer (*.GBL) w5: v1(2265.05,2462.31) 2267.72,2462.31 2295.22,2434.81 2794.05,2434.81 2945.05,2585.81 2945.05,2887.41 3113.05,3055.41 J2.80@3173.06,3055.41
NetD123_2: D123.2 R18.2 | length 62.3
  Top Layer (*.GTL) w5: D123.2@4328.05,929.53 R18.2@4328.05,991.81
NetD124_2: D124.2 R19.2 | length 62.3
  Top Layer (*.GTL) w5: D124.2@4228.05,929.53 R19.2@4228.05,991.81
NetD125_1: D125.1 J6.23 U1.A84 | length 4467.3
  Top Layer (*.GTL) w5: v1(2055.05,2063.35) 2057.72,2063.35 2073.26,2047.81 2479.61,2047.81 2864.05,2432.25 2864.05,2765.87 3114.05,3015.87 U1.A84@3164.9,3015.87 ; J6.23@4228.05,1286.81 D125.1@4228.05,1419.09
  Bottom Layer (*.GBL) w5: v1(2055.05,2063.35) 3669.51,2063.35 4228.05,1504.81 J6.23@4228.05,1286.81
NetD125_2: D125.2 J2.84 | length 3775
  Top Layer (*.GTL) w5: D125.2@4227.05,1454.53 v1@4251.05,1478.53
  Mid-Layer 1 (*.G1) w5: v1(2265.05,2447.31) 3338.55,2447.31 4251.05,1534.81 v1(4251.05,1481.81)
  Bottom Layer (*.GBL) w5: v1(2265.05,2447.31) 2267.72,2447.31 2290.22,2424.81 2798.19,2424.81 2955.05,2581.67 2955.05,2858.01 3113.05,3016.01 J2.84@3173.06,3016.01
NetD126_2: D126.2 R20.2 | length 62.3
  Top Layer (*.GTL) w5: D126.2@4128.05,929.53 R20.2@4128.05,991.81
NetD127_2: D127.2 R21.2 | length 62.3
  Top Layer (*.GTL) w5: D127.2@4028.05,929.53 R21.2@4028.05,991.81
NetD128_1: D128.1 J6.27 U1.A88 | length 4236.3
  Top Layer (*.GTL) w5: v1(2055.05,2033.35) 2057.72,2033.35 2063.26,2027.81 2487.89,2027.81 2884.05,2423.96 2884.05,2746.5 3114.05,2976.5 U1.A88@3164.9,2976.5 ; J6.27@4028.05,1286.81 D128.1@4028.05,1419.09
  Bottom Layer (*.GBL) w5: v1(2055.05,2033.35) 3499.51,2033.35 4028.05,1504.81 J6.27@4028.05,1286.81
NetD128_2: D128.2 J2.88 | length 3539.7
  Top Layer (*.GTL) w5: D128.2@4027.05,1454.53 v1@4051.05,1478.53
  Mid-Layer 1 (*.G1) w5: v1(2265.05,2432.31) 3153.55,2432.31 4051.05,1534.81 v1(4051.05,1481.81)
  Bottom Layer (*.GBL) w5: v1(2265.05,2432.31) 2267.72,2432.31 2285.22,2414.81 2802.33,2414.81 2965.05,2577.53 2965.05,2828.61 3113.05,2976.61 J2.88@3173.06,2976.61
NetD129_2: D129.2 R22.2 | length 62.3
  Top Layer (*.GTL) w5: D129.2@3928.05,929.53 R22.2@3928.05,991.81
NetD130_2: D130.2 R23.2 | length 62.3
  Top Layer (*.GTL) w5: D130.2@3828.05,929.53 R23.2@3828.05,991.81
NetD131_1: D131.1 J6.31 U1.A92 | length 4008.9
  Top Layer (*.GTL) w5: v1(2055.05,2003.35) 2057.72,2003.35 2062.19,2007.81 2496.18,2007.81 2904.05,2415.68 2904.05,2727.13 3114.05,2937.13 U1.A92@3164.9,2937.13 ; J6.31@3828.05,1286.81 D131.1@3828.05,1419.09
  Bottom Layer (*.GBL) w5: v1(2055.05,2003.35) 3329.51,2003.35 3828.05,1504.81 J6.31@3828.05,1286.81
NetD131_2: D131.2 J2.92 | length 3304.5
  Top Layer (*.GTL) w5: D131.2@3827.05,1454.53 v1@3851.05,1478.53
  Mid-Layer 1 (*.G1) w5: v1(2265.05,2417.31) 2968.55,2417.31 3851.05,1534.81 v1(3851.05,1481.81)
  Bottom Layer (*.GBL) w5: v1(2265.05,2417.31) 2267.72,2417.31 2280.22,2404.81 2806.47,2404.81 2975.05,2573.38 2975.05,2799.21 3113.05,2937.21 J2.92@3173.06,2937.21
NetD132_2: D132.2 R24.2 | length 62.3
  Top Layer (*.GTL) w5: D132.2@3728.05,929.53 R24.2@3728.05,991.81
NetD133_2: D133.2 R25.2 | length 62.3
  Top Layer (*.GTL) w5: D133.2@3628.05,929.53 R25.2@3628.05,991.81
NetD134_1: D134.1 J6.35 U1.A96 | length 3786.1
  Top Layer (*.GTL) w5: v1(2055.05,1973.35) 2057.72,1973.35 2072.19,1987.81 2504.46,1987.81 2924.05,2407.4 2924.05,2707.76 3114.05,2897.76 U1.A96@3164.9,2897.76 ; J6.35@3628.05,1286.81 D134.1@3628.05,1419.09
  Bottom Layer (*.GBL) w5: v1(2055.05,1973.35) 3159.51,1973.35 3628.05,1504.81 J6.35@3628.05,1286.81
NetD134_2: D134.2 J2.96 | length 3069.2
  Top Layer (*.GTL) w5: D134.2@3627.05,1454.53 v1@3651.05,1478.53
  Mid-Layer 1 (*.G1) w5: v1(2265.05,2402.31) 2783.55,2402.31 3651.05,1534.81 v1(3651.05,1481.81)
  Bottom Layer (*.GBL) w5: v1(2265.05,2402.31) 2267.72,2402.31 2275.22,2394.81 2810.62,2394.81 2985.05,2569.24 2985.05,2769.81 3113.05,2897.81 J2.96@3173.06,2897.81
NetD135_2: D135.2 R26.2 | length 62.3
  Top Layer (*.GTL) w5: D135.2@3528.05,929.53 R26.2@3528.05,991.81
NetD136_2: D136.2 R27.2 | length 62.3
  Top Layer (*.GTL) w5: D136.2@3428.05,929.53 R27.2@3428.05,991.81